# Altium PCB A1_v31.PcbDoc (part 2 of 6)
Units mil, origin at the board's own origin, x right, y up, seen from the top; angles counter-clockwise.
Board outline 3937.01 x 3149.61 mil, 2 copper layers (Top Layer, Bottom Layer); 94 components, 93 nets, 325 pads, 43 vias.
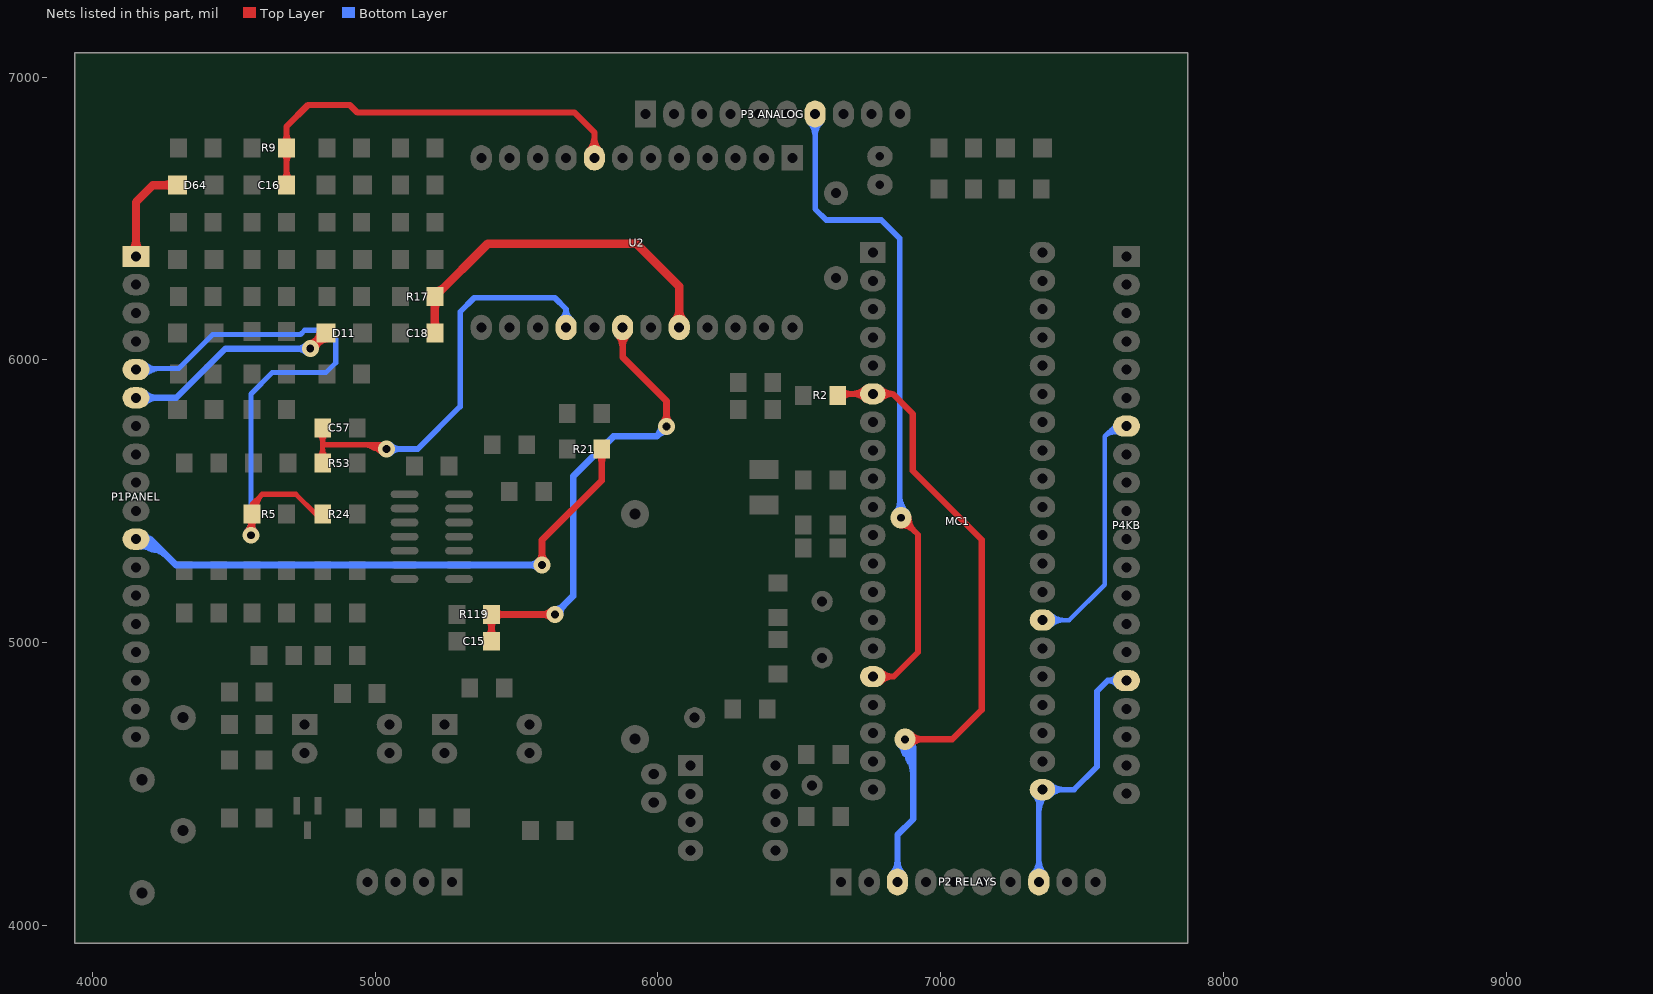
[diagram p2: the nets of this part, all layers, seen from the top]

## Via types
v1: diameter 60, hole 28, Top Layer to Bottom Layer, 30 vias
v2: diameter 90, hole 35.43, Top Layer to Bottom Layer, 6 vias
v3: diameter 75, hole 28, Top Layer to Bottom Layer, 5 vias
v4: diameter 75, hole 35.43, Top Layer to Bottom Layer, 2 vias

## Nets (pads, with @x,y where several pads share a name; then routed paths per layer and width w, separated by ;. In a path a pad name is that pad's centre, name@x,y a point inside that pad or via, vN(x,y) a via of type N, cw(c..) or ccw(c..) an arc to the next point about the centre after c; other vN are vias at no path point) (continued)
EMSTP: C18.2 R17.2 U2.20 | length 1969.8
  Top Layer w30: C18.2@5211.02,6095 R17.2@5211.02,6224.43 5397.6,6411 5924,6411 6075,6260 U2.20@6075,6115 ; C18.2@5200.75,6109.21 ccw(c5175.95,6134.01) 5211.02,6134.01 ; C18.2@5200.75,6109.21 ccw(c5175.95,6134.01) 5211.02,6134.01 ; C18.2@5200.75,6109.21 ccw(c5175.95,6134.01) 5211.02,6134.01 ; R17.2@5200.75,6210.22 cw(c5175.95,6185.42) 5211.02,6185.42 ; R17.2@5200.75,6210.22 cw(c5175.95,6185.42) 5211.02,6185.42 ; R17.2@5200.75,6210.22 cw(c5175.95,6185.42) 5211.02,6185.42 ; 5211.02,6134.01 ccw(c5246.1,6134.01) C18.2@5221.3,6109.21 ; 5211.02,6134.01 ccw(c5246.1,6134.01) C18.2@5221.3,6109.21 ; 5211.02,6134.01 ccw(c5246.1,6134.01) C18.2@5221.3,6109.21 ; 5211.02,6185.42 cw(c5246.1,6185.42) R17.2@5221.3,6210.22 ; 5211.02,6185.42 cw(c5246.1,6185.42) R17.2@5221.3,6210.22 ; 5211.02,6185.42 cw(c5246.1,6185.42) R17.2@5221.3,6210.22 ; R17.2@5211.02,6242.89 ccw(c5211.02,6287.47) 5242.54,6255.95 ; R17.2@5211.02,6242.89 ccw(c5211.02,6287.47) 5242.54,6255.95 ; R17.2@5211.02,6242.89 ccw(c5211.02,6287.47) 5242.54,6255.95 ; U2.20@6059.09,6138.41 ccw(c6020.68,6176.82) 6075,6176.82 ; U2.20@6059.09,6138.41 ccw(c6020.68,6176.82) 6075,6176.82 ; U2.20@6059.09,6138.41 ccw(c6020.68,6176.82) 6075,6176.82 ; 6075,6176.82 ccw(c6129.32,6176.82) U2.20@6090.91,6138.41 ; 6075,6176.82 ccw(c6129.32,6176.82) U2.20@6090.91,6138.41 ; 6075,6176.82 ccw(c6129.32,6176.82) U2.20@6090.91,6138.41
EMSTPIN: D11.2 P1PANEL.6 | length 4512.8
  Top Layer w22: v1(4770.04,6040) D11.2@4825.04,6095 ; v1@4771.65,6058.93 ccw(c4774.37,6091.01) 4797.14,6068.25 ccw(c4818.04,6047.35) v1@4788.82,6042.87 ; v1@4772.91,6058.78 ccw(c4777.39,6088) 4798.29,6067.1 ccw(c4821.05,6044.33) v1@4788.97,6041.61 ; v1@4783.47,6054.58 cw(c4815.81,6035.9) D11.2@4821.57,6072.8 ; v1@4784.62,6053.43 ccw(c4765.94,6085.77) D11.2@4802.84,6091.53 ; v1@4766.6,6058.69 ccw(c4757.13,6110.19) D11.2@4802.49,6084.01 ; v1@4766.6,6058.69 ccw(c4757.13,6110.19) D11.2@4802.49,6084.01 ; v1@4766.6,6058.69 ccw(c4757.13,6110.19) D11.2@4802.49,6084.01 ; v1@4766.6,6058.69 ccw(c4757.13,6110.19) D11.2@4802.49,6084.01 ; v1@4766.6,6058.69 ccw(c4757.13,6110.19) D11.2@4802.49,6084.01 ; v1@4766.6,6058.69 ccw(c4757.13,6110.19) D11.2@4802.49,6084.01 ; v1@4767.1,6040.6 cw(c4797.25,6034.43) 4789.29,6064.16 ; v1@4767.1,6040.6 cw(c4797.25,6034.43) 4789.29,6064.16 ; v1@4767.1,6040.6 cw(c4797.25,6034.43) 4789.29,6064.16 ; v1@4770.04,6059 ccw(c4770.04,6104.87) D11.2@4802.48,6072.44 ; v1@4770.04,6059 ccw(c4770.04,6104.87) D11.2@4802.48,6072.44 ; v1@4770.04,6059 ccw(c4770.04,6104.87) D11.2@4802.48,6072.44 ; v1@4770.64,6037.06 ccw(c4764.47,6067.21) 4794.2,6059.25 ; v1@4770.64,6037.06 ccw(c4764.47,6067.21) 4794.2,6059.25 ; v1@4770.64,6037.06 ccw(c4764.47,6067.21) 4794.2,6059.25 ; v1@4772.54,6058.83 ccw(c4777.25,6094.3) D11.2@4808.24,6076.41 ; v1@4772.54,6058.83 ccw(c4777.25,6094.3) D11.2@4808.24,6076.41 ; v1@4772.54,6058.83 ccw(c4777.25,6094.3) D11.2@4808.24,6076.41 ; v1@4772.54,6058.83 ccw(c4777.25,6094.3) D11.2@4808.24,6076.41 ; v1@4772.54,6058.83 ccw(c4777.25,6094.3) D11.2@4808.24,6076.41 ; v1@4774.96,6058.35 ccw(c4781.44,6082.56) 4793.97,6060.86 ; v1@4774.96,6058.35 ccw(c4781.44,6082.56) 4793.97,6060.86 ; v1@4774.96,6058.35 ccw(c4781.44,6082.56) 4793.97,6060.86 ; v1@4774.96,6058.35 ccw(c4781.44,6082.56) 4793.97,6060.86 ; v1@4774.96,6058.35 ccw(c4781.44,6082.56) 4793.97,6060.86 ; v1@4774.96,6058.35 ccw(c4781.44,6082.56) 4793.97,6060.86 ; v1@4775.45,6058.21 ccw(c4784.38,6088.32) D11.2@4806.59,6066.11 ; v1@4775.45,6058.21 ccw(c4784.38,6088.32) D11.2@4806.59,6066.11 ; v1@4775.45,6058.21 ccw(c4784.38,6088.32) D11.2@4806.59,6066.11 ; v1@4775.45,6058.21 ccw(c4784.38,6088.32) D11.2@4806.59,6066.11 ; v1@4777.78,6058.18 ccw(c4752.69,6101.65) D11.2@4802.67,6097.06 ; v1@4777.78,6058.18 ccw(c4752.69,6101.65) D11.2@4802.67,6097.06 ; v1@4777.78,6058.18 ccw(c4752.69,6101.65) D11.2@4802.67,6097.06 ; v1@4783.32,6064.84 cw(c4808.08,6040.08) D11.2@4818.41,6073.54 ; v1@4783.32,6064.84 cw(c4808.08,6040.08) D11.2@4818.41,6073.54 ; v1@4783.32,6064.84 cw(c4808.08,6040.08) D11.2@4818.41,6073.54 ; v1@4783.32,6064.84 cw(c4808.08,6040.08) D11.2@4818.41,6073.54 ; v1@4786.69,6056.65 cw(c4825.04,6018.3) D11.2@4825.04,6072.54 ; v1@4786.69,6056.65 ccw(c4748.34,6095) D11.2@4802.58,6095 ; v1@4786.69,6056.65 ccw(c4748.34,6095) D11.2@4802.58,6095 ; v1@4786.69,6056.65 cw(c4825.04,6018.3) D11.2@4825.04,6072.54 ; v1@4786.69,6056.65 ccw(c4748.34,6095) D11.2@4802.58,6095 ; v1@4786.69,6056.65 cw(c4825.04,6018.3) D11.2@4825.04,6072.54 ; v1@4788.22,6047.74 cw(c4831.69,6022.65) D11.2@4827.1,6072.63 ; v1@4788.22,6047.74 cw(c4831.69,6022.65) D11.2@4827.1,6072.63 ; v1@4788.22,6047.74 cw(c4831.69,6022.65) D11.2@4827.1,6072.63 ; v1@4788.25,6045.41 cw(c4818.36,6054.34) D11.2@4796.15,6076.55 ; v1@4788.25,6045.41 cw(c4818.36,6054.34) D11.2@4796.15,6076.55 ; v1@4788.25,6045.41 cw(c4818.36,6054.34) D11.2@4796.15,6076.55 ; v1@4788.25,6045.41 cw(c4818.36,6054.34) D11.2@4796.15,6076.55 ; v1@4788.39,6044.92 cw(c4812.6,6051.4) 4790.9,6063.93 ; v1@4788.39,6044.92 cw(c4812.6,6051.4) 4790.9,6063.93 ; v1@4788.39,6044.92 cw(c4812.6,6051.4) 4790.9,6063.93 ; v1@4788.39,6044.92 cw(c4812.6,6051.4) 4790.9,6063.93 ; v1@4788.39,6044.92 cw(c4812.6,6051.4) 4790.9,6063.93 ; v1@4788.39,6044.92 cw(c4812.6,6051.4) 4790.9,6063.93 ; v1@4788.73,6036.56 cw(c4840.23,6027.09) D11.2@4814.05,6072.45 ; v1@4788.73,6036.56 cw(c4840.23,6027.09) D11.2@4814.05,6072.45 ; v1@4788.73,6036.56 cw(c4840.23,6027.09) D11.2@4814.05,6072.45 ; v1@4788.73,6036.56 cw(c4840.23,6027.09) D11.2@4814.05,6072.45 ; v1@4788.73,6036.56 cw(c4840.23,6027.09) D11.2@4814.05,6072.45 ; v1@4788.73,6036.56 cw(c4840.23,6027.09) D11.2@4814.05,6072.45 ; v1@4788.87,6042.5 cw(c4824.34,6047.21) D11.2@4806.45,6078.2 ; v1@4788.87,6042.5 cw(c4824.34,6047.21) D11.2@4806.45,6078.2 ; v1@4788.87,6042.5 cw(c4824.34,6047.21) D11.2@4806.45,6078.2 ; v1@4788.87,6042.5 cw(c4824.34,6047.21) D11.2@4806.45,6078.2 ; v1@4788.87,6042.5 cw(c4824.34,6047.21) D11.2@4806.45,6078.2 ; v1@4789.04,6040 cw(c4834.91,6040) D11.2@4802.48,6072.44 ; v1@4789.04,6040 cw(c4834.91,6040) D11.2@4802.48,6072.44 ; v1@4789.04,6040 cw(c4834.91,6040) D11.2@4802.48,6072.44 ; D11.2@4794.87,6076.39 ccw(c4776.26,6095) D11.2@4802.58,6095 ; D11.2@4794.87,6076.39 ccw(c4776.26,6095) D11.2@4802.58,6095 ; D11.2@4794.87,6076.39 ccw(c4776.26,6095) D11.2@4802.58,6095 ; D11.2@4794.87,6076.39 ccw(c4776.26,6095) D11.2@4802.58,6095 ; v1@4794.88,6053.28 ccw(c4770.12,6078.04) D11.2@4803.58,6088.37 ; v1@4794.88,6053.28 ccw(c4770.12,6078.04) D11.2@4803.58,6088.37 ; v1@4794.88,6053.28 ccw(c4770.12,6078.04) D11.2@4803.58,6088.37 ; v1@4794.88,6053.28 ccw(c4770.12,6078.04) D11.2@4803.58,6088.37 ; D11.2@4799.47,6070.7 cw(c4812.49,6048.15) D11.2@4819.23,6073.3 ; D11.2@4799.47,6070.7 cw(c4812.49,6048.15) D11.2@4819.23,6073.3 ; D11.2@4799.47,6070.7 cw(c4812.49,6048.15) D11.2@4819.23,6073.3 ; D11.2@4800.74,6069.43 ccw(c4778.19,6082.45) D11.2@4803.34,6089.19 ; D11.2@4800.74,6069.43 ccw(c4778.19,6082.45) D11.2@4803.34,6089.19 ; D11.2@4800.74,6069.43 ccw(c4778.19,6082.45) D11.2@4803.34,6089.19 ; D11.2@4806.43,6064.83 cw(c4825.04,6046.22) D11.2@4825.04,6072.54 ; D11.2@4806.43,6064.83 cw(c4825.04,6046.22) D11.2@4825.04,6072.54 ; D11.2@4806.43,6064.83 cw(c4825.04,6046.22) D11.2@4825.04,6072.54 ; D11.2@4806.43,6064.83 cw(c4825.04,6046.22) D11.2@4825.04,6072.54
  Bottom Layer w22: P1PANEL.6@4153.54,5866.14 4296.14,5866.14 4470,6040 v1(4770.04,6040) ; P1PANEL.6@4182.28,5847.4 cw(c4227.52,5802.17) 4227.52,5866.14 ; P1PANEL.6@4182.28,5847.4 cw(c4227.52,5802.17) 4227.52,5866.14 ; P1PANEL.6@4182.28,5847.4 cw(c4227.52,5802.17) 4227.52,5866.14 ; P1PANEL.6@4182.28,5884.88 ccw(c4227.52,5930.12) 4227.52,5866.14 ; P1PANEL.6@4182.28,5884.88 ccw(c4227.52,5930.12) 4227.52,5866.14 ; P1PANEL.6@4182.28,5884.88 ccw(c4227.52,5930.12) 4227.52,5866.14 ; 4724.17,6040 cw(c4724.17,5994.13) v1@4756.6,6026.56 ; 4724.17,6040 ccw(c4724.17,6085.87) v1@4756.6,6053.44 ; 4724.17,6040 ccw(c4724.17,6085.87) v1@4756.6,6053.44 ; 4724.17,6040 cw(c4724.17,5994.13) v1@4756.6,6026.56 ; 4724.17,6040 ccw(c4724.17,6085.87) v1@4756.6,6053.44 ; 4724.17,6040 cw(c4724.17,5994.13) v1@4756.6,6026.56
FAULTIND: MC1.27 P4KB.7 | length 1442.3
  Bottom Layer w16: MC1.27@7360,5080 7455,5080 7580,5205 7580,5729.61 ; P4KB.7@7657.48,5766.14 7616.53,5766.14 7580,5729.61 ; MC1.27@7388.36,5059.14 cw(c7438.72,5008.78) 7438.72,5080 ; MC1.27@7388.36,5059.14 cw(c7438.72,5008.78) 7438.72,5080 ; MC1.27@7388.36,5059.14 cw(c7438.72,5008.78) 7438.72,5080 ; MC1.27@7388.36,5100.86 ccw(c7438.72,5151.22) 7438.72,5080 ; MC1.27@7388.36,5100.86 ccw(c7438.72,5151.22) 7438.72,5080 ; MC1.27@7388.36,5100.86 ccw(c7438.72,5151.22) 7438.72,5080 ; 7580,5729.61 cw(c7614.53,5695.08) 7635.07,5739.38 ccw(c7614.53,5695.08) 7580,5729.61 ; 7596.2,5745.8 cw(c7624.79,5717.21) 7641.8,5753.89 ccw(c7624.79,5717.21) 7596.2,5745.8
FLDIR: C57.1 R53.1 U2.16 | length 2880.7
  Top Layer w18: R53.1@4813.98,5635 4813.98,5700 C57.1@4813.98,5740 ; R53.1@4799.46,5653.45 ccw(c4764.42,5688.49) 4813.98,5688.49 ; R53.1@4799.46,5653.45 ccw(c4764.42,5688.49) 4813.98,5688.49 ; R53.1@4799.46,5653.45 ccw(c4764.42,5688.49) 4813.98,5688.49 ; C57.1@4799.46,5741.55 cw(c4764.42,5706.51) 4813.98,5706.51 ; C57.1@4799.46,5741.55 cw(c4764.42,5706.51) 4813.98,5706.51 ; C57.1@4799.46,5741.55 cw(c4764.42,5706.51) 4813.98,5706.51 ; 4813.98,5688.49 ccw(c4863.53,5688.49) R53.1@4828.49,5653.45 ; 4813.98,5688.49 ccw(c4863.53,5688.49) R53.1@4828.49,5653.45 ; 4813.98,5688.49 ccw(c4863.53,5688.49) R53.1@4828.49,5653.45 ; 4813.98,5706.51 cw(c4863.53,5706.51) C57.1@4828.49,5741.55 ; 4813.98,5706.51 cw(c4863.53,5706.51) C57.1@4828.49,5741.55 ; 4813.98,5706.51 cw(c4863.53,5706.51) C57.1@4828.49,5741.55
  Top Layer w20: 4813.98,5700 5025,5700 v1(5040,5685) ; 4955.5,5700 cw(c4955.5,5600.5) v1@5025.86,5670.86 ; 4955.5,5700 cw(c4955.5,5600.5) v1@5025.86,5670.86 ; 4955.5,5700 cw(c4955.5,5600.5) v1@5025.86,5670.86 ; 4990.91,5691.03 ccw(c5003.92,5713.56) v1@5024.32,5697.41 ; 4990.91,5691.03 ccw(c5003.92,5713.56) v1@5024.32,5697.41 ; 4990.91,5691.03 ccw(c5003.92,5713.56) v1@5024.32,5697.41 ; 5003.79,5700 cw(c5003.79,5648.79) v1(5040,5685) ; 5003.79,5700 cw(c5003.79,5648.79) v1(5040,5685) ; 5003.79,5700 cw(c5003.79,5648.79) v1(5040,5685)
  Bottom Layer w20: v1(5040,5685) 5150,5685 5300,5835 5300,6170 5350,6220 5635,6220 5675,6180 ; U2.16@5675,6115 5675,6180 ; v1@5054.14,5670.86 cw(c5088.28,5636.72) 5088.28,5685 ; v1@5054.14,5670.86 cw(c5088.28,5636.72) 5088.28,5685 ; v1@5054.14,5670.86 cw(c5088.28,5636.72) 5088.28,5685 ; v1@5054.14,5699.14 ccw(c5088.28,5733.28) 5088.28,5685 ; v1@5054.14,5699.14 ccw(c5088.28,5733.28) 5088.28,5685 ; v1@5054.14,5699.14 ccw(c5088.28,5733.28) 5088.28,5685 ; U2.16@5657.74,6143.91 ccw(c5628.64,6180) 5675,6180 ; U2.16@5657.74,6143.91 ccw(c5628.64,6180) 5675,6180 ; U2.16@5657.74,6143.91 ccw(c5628.64,6180) 5675,6180 ; 5675,6180 ccw(c5721.36,6180) U2.16@5692.26,6143.91 ; 5675,6180 ccw(c5721.36,6180) U2.16@5692.26,6143.91 ; 5675,6180 ccw(c5721.36,6180) U2.16@5692.26,6143.91
FLDIRIN: P1PANEL.5 R5.2 R24.1 | length 2648.5
  Top Layer w18: v1@4545.15,5394.85 ccw(c4509.3,5430.7) 4560,5430.7 ccw(c4610.7,5430.7) v1@4574.85,5394.85 ; R5.2@4549.46,5436.55 cw(c4524.02,5411.1) 4560,5411.1 ; v1@4550.97,5398.96 ccw(c4538.04,5426.09) 4567.08,5418.32 ccw(c4588.68,5412.53) v1@4573.89,5395.75 ; R5.2@4556.52,5478.06 ccw(c4552.26,5488.98) 4563.98,5488.98 ; v1(4560,5380) 4560,5451.02 R5.2@4563.98,5455 4563.98,5488.98 ; v1@4560,5391.91 cw(c4623.13,5391.91) R5.2@4578.49,5436.55 ; R5.2@4566.42,5459.6 cw(c4609.72,5471.29) 4578,5503 ; R5.2@4571.43,5478.06 cw(c4575.69,5488.98) 4563.98,5488.98 ; R5.2@4583.79,5464.29 cw(c4644.35,5480.64) 4600,5525 ; R24.1@4813.98,5455 4789,5455 4719,5525 4600,5525 ; 4563.98,5488.98 4600,5525
  Bottom Layer w18: P1PANEL.5@4153.54,5966.14 4157.4,5970 4305,5970 4425,6090 4735.14,6090 4750.14,6105 4830,6105 4860,6075 4860,5990 4825,5955 4635,5955 4560,5880 v1(4560,5380) ; P1PANEL.5@4183.7,5945.99 cw(c4241.66,5888.02) 4241.66,5970 ; P1PANEL.5@4183.7,5986.29 ccw(c4223.04,6025.63) 4223.04,5970 ; v1@4545.15,5394.85 ccw(c4509.3,5430.7) 4560,5430.7 ccw(c4610.7,5430.7) v1@4574.85,5394.85
FLG: C15.1 R119.2 U2.18 | length 3358.7
  Top Layer w24: C15.1@5411.02,5005 R119.2@5411.02,5100 v1(5635,5100) ; U2.18@5875,6115 5875,6010 6030,5855 v1(6030,5765) ; C15.1@5398.63,5021.33 ccw(c5368.71,5051.25) 5411.02,5051.25 ; C15.1@5398.63,5021.33 ccw(c5368.71,5051.25) 5411.02,5051.25 ; C15.1@5398.63,5021.33 ccw(c5368.71,5051.25) 5411.02,5051.25 ; R119.2@5398.63,5083.67 cw(c5368.71,5053.75) 5411.02,5053.75 ; R119.2@5398.63,5083.67 cw(c5368.71,5053.75) 5411.02,5053.75 ; R119.2@5398.63,5083.67 cw(c5368.71,5053.75) 5411.02,5053.75 ; 5411.02,5051.25 ccw(c5453.34,5051.25) C15.1@5423.42,5021.33 ; 5411.02,5051.25 ccw(c5453.34,5051.25) C15.1@5423.42,5021.33 ; 5411.02,5051.25 ccw(c5453.34,5051.25) C15.1@5423.42,5021.33 ; 5411.02,5053.75 cw(c5453.34,5053.75) R119.2@5423.42,5083.67 ; 5411.02,5053.75 cw(c5453.34,5053.75) R119.2@5423.42,5083.67 ; 5411.02,5053.75 cw(c5453.34,5053.75) R119.2@5423.42,5083.67 ; R119.2@5423.42,5087.61 cw(c5453.34,5057.68) 5453.34,5100 ; R119.2@5423.42,5087.61 cw(c5453.34,5057.68) 5453.34,5100 ; R119.2@5423.42,5087.61 cw(c5453.34,5057.68) 5453.34,5100 ; R119.2@5423.42,5112.39 ccw(c5453.34,5142.32) 5453.34,5100 ; R119.2@5423.42,5112.39 ccw(c5453.34,5142.32) 5453.34,5100 ; R119.2@5423.42,5112.39 ccw(c5453.34,5142.32) 5453.34,5100 ; 5591.54,5100 cw(c5591.54,5056.54) v1@5622.27,5087.27 ; 5591.54,5100 ccw(c5591.54,5143.46) v1@5622.27,5112.73 ; 5591.54,5100 ccw(c5591.54,5143.46) v1@5622.27,5112.73 ; 5591.54,5100 cw(c5591.54,5056.54) v1@5622.27,5087.27 ; 5591.54,5100 ccw(c5591.54,5143.46) v1@5622.27,5112.73 ; 5591.54,5100 cw(c5591.54,5056.54) v1@5622.27,5087.27 ; U2.18@5856.97,6089.47 cw(c5813.44,6045.94) 5875,6045.94 ; U2.18@5856.97,6089.47 cw(c5813.44,6045.94) 5875,6045.94 ; U2.18@5856.97,6089.47 cw(c5813.44,6045.94) 5875,6045.94 ; 5875,6045.94 cw(c5936.56,6045.94) U2.18@5893.03,6089.47 ; 5875,6045.94 cw(c5936.56,6045.94) U2.18@5893.03,6089.47 ; 5875,6045.94 cw(c5936.56,6045.94) U2.18@5893.03,6089.47 ; v1@6017.27,5777.73 ccw(c5986.54,5808.46) 6030,5808.46 ; v1@6017.27,5777.73 ccw(c5986.54,5808.46) 6030,5808.46 ; v1@6017.27,5777.73 ccw(c5986.54,5808.46) 6030,5808.46 ; 6030,5808.46 ccw(c6073.46,5808.46) v1@6042.73,5777.73 ; 6030,5808.46 ccw(c6073.46,5808.46) v1@6042.73,5777.73 ; 6030,5808.46 ccw(c6073.46,5808.46) v1@6042.73,5777.73
  Bottom Layer w24: v1(5635,5100) 5700,5165 5700,5587.67 5842.33,5730 5995,5730 v1(6030,5765) ; v1@5635,5118 ccw(c5635,5161.46) 5665.73,5130.73 ; v1@5635,5118 ccw(c5635,5161.46) 5665.73,5130.73 ; v1@5635,5118 ccw(c5635,5161.46) 5665.73,5130.73 ; v1@5653,5100 cw(c5696.46,5100) 5665.73,5130.73 ; v1@5653,5100 cw(c5696.46,5100) 5665.73,5130.73 ; v1@5653,5100 cw(c5696.46,5100) 5665.73,5130.73 ; 5999.27,5734.27 cw(c6030,5703.54) v1@6030,5747 ; 5999.27,5734.27 ccw(c5968.54,5765) v1@6012,5765 ; 5999.27,5734.27 ccw(c5968.54,5765) v1@6012,5765 ; 5999.27,5734.27 cw(c6030,5703.54) v1@6030,5747 ; 5999.27,5734.27 ccw(c5968.54,5765) v1@6012,5765 ; 5999.27,5734.27 cw(c6030,5703.54) v1@6030,5747
FLGIN: P1PANEL.11 R21.2 | length 3675.7
  Top Layer w24: v1(5590,5275) 5590,5362.95 5801.02,5573.98 R21.2@5801.02,5685 ; v1@5577.27,5287.73 ccw(c5546.54,5318.46) 5590,5318.46 ; v1@5577.27,5287.73 ccw(c5546.54,5318.46) 5590,5318.46 ; v1@5577.27,5287.73 ccw(c5546.54,5318.46) 5590,5318.46 ; 5590,5318.46 ccw(c5633.46,5318.46) v1@5602.73,5287.73 ; 5590,5318.46 ccw(c5633.46,5318.46) v1@5602.73,5287.73 ; 5590,5318.46 ccw(c5633.46,5318.46) v1@5602.73,5287.73 ; R21.2@5788.63,5668.67 cw(c5758.71,5638.75) 5801.02,5638.75 ; R21.2@5788.63,5668.67 cw(c5758.71,5638.75) 5801.02,5638.75 ; R21.2@5788.63,5668.67 cw(c5758.71,5638.75) 5801.02,5638.75 ; 5801.02,5638.75 cw(c5843.34,5638.75) R21.2@5813.42,5668.67 ; 5801.02,5638.75 cw(c5843.34,5638.75) R21.2@5813.42,5668.67 ; 5801.02,5638.75 cw(c5843.34,5638.75) R21.2@5813.42,5668.67
  Bottom Layer w24: P1PANEL.11@4153.54,5366.14 4203.86,5366.14 ; P1PANEL.11@4163.76,5364.66 cw(c4174.2,5292.02) 4226.09,5343.91 ; P1PANEL.11@4167.17,5340.9 cw(c4182.72,5232.73) 4260,5310 ; v1(5590,5275) 4295,5275 4203.86,5366.14 ; P1PANEL.11@4164.81,5366.95 ccw(c4238.59,5414.4) 4219.96,5328.68 ; P1PANEL.11@4164.81,5366.95 ccw(c4238.59,5414.4) 4219.96,5328.68 ; P1PANEL.11@4164.81,5366.95 ccw(c4238.59,5414.4) 4219.96,5328.68 ; P1PANEL.11@4179.57,5346.31 cw(c4204.03,5316.02) 4212.3,5354.07 ; P1PANEL.11@4179.57,5346.31 cw(c4204.03,5316.02) 4212.3,5354.07 ; P1PANEL.11@4179.57,5346.31 cw(c4204.03,5316.02) 4212.3,5354.07 ; P1PANEL.11@4186.59,5355.22 cw(c4203.86,5347.03) 4203.86,5366.14 ; P1PANEL.11@4186.59,5355.22 cw(c4203.86,5347.03) 4203.86,5366.14 ; P1PANEL.11@4186.59,5355.22 cw(c4203.86,5347.03) 4203.86,5366.14 ; P1PANEL.11@4186.59,5377.07 ccw(c4203.86,5385.26) 4203.86,5366.14 ; P1PANEL.11@4186.59,5377.07 ccw(c4203.86,5385.26) 4203.86,5366.14 ; P1PANEL.11@4186.59,5377.07 ccw(c4203.86,5385.26) 4203.86,5366.14 ; P1PANEL.11@4187.3,5375.4 ccw(c4219.68,5388.02) 4212.3,5354.07 ; P1PANEL.11@4187.3,5375.4 ccw(c4219.68,5388.02) 4212.3,5354.07 ; P1PANEL.11@4187.3,5375.4 ccw(c4219.68,5388.02) 4212.3,5354.07 ; 5546.54,5275 cw(c5546.54,5231.54) v1@5577.27,5262.27 ; 5546.54,5275 ccw(c5546.54,5318.46) v1@5577.27,5287.73 ; 5546.54,5275 ccw(c5546.54,5318.46) v1@5577.27,5287.73 ; 5546.54,5275 cw(c5546.54,5231.54) v1@5577.27,5262.27 ; 5546.54,5275 ccw(c5546.54,5318.46) v1@5577.27,5287.73 ; 5546.54,5275 cw(c5546.54,5231.54) v1@5577.27,5262.27 ; P1PANEL.11@4163.62,5364.64 cw(c4167.93,5274.63) 4231.65,5338.35 ccw(c4167.93,5274.63) P1PANEL.11@4163.62,5364.64 ; P1PANEL.11@4164.76,5340.67 cw(c4171.43,5201.44) 4270,5300 ccw(c4171.43,5201.44) P1PANEL.11@4164.76,5340.67
FLSTART: "P2 RELAYS.3" MC1.6 R2.1 | length 5068.9
  Top Layer w22: R2.1@6636.02,5875 6641.02,5880 MC1.6@6760,5880 6830,5880 ; v3(6874,4658) 7041,4658 7145,4762 7145,5364 6901,5608 6901,5809 6830,5880 ; R2.1@6649.12,5865.84 cw(c6683.32,5831.64) 6683.32,5880 ; R2.1@6649.12,5865.84 cw(c6683.32,5831.64) 6683.32,5880 ; R2.1@6649.12,5865.84 cw(c6683.32,5831.64) 6683.32,5880 ; R2.1@6649.12,5892.04 ccw(c6678.19,5921.1) 6678.19,5880 ; R2.1@6649.12,5892.04 ccw(c6678.19,5921.1) 6678.19,5880 ; R2.1@6649.12,5892.04 ccw(c6678.19,5921.1) 6678.19,5880 ; 6688.52,5880 cw(c6688.52,5816.02) MC1.6@6733.76,5861.26 ; 6688.52,5880 ccw(c6688.52,5943.98) MC1.6@6733.76,5898.74 ; 6688.52,5880 ccw(c6688.52,5943.98) MC1.6@6733.76,5898.74 ; 6688.52,5880 cw(c6688.52,5816.02) MC1.6@6733.76,5861.26 ; 6688.52,5880 ccw(c6688.52,5943.98) MC1.6@6733.76,5898.74 ; 6688.52,5880 cw(c6688.52,5816.02) MC1.6@6733.76,5861.26 ; MC1.6@6786.55,5861.58 cw(c6830,5819.55) 6830,5880 ; MC1.6@6786.55,5861.58 cw(c6830,5819.55) 6830,5880 ; MC1.6@6786.55,5861.58 cw(c6830,5819.55) 6830,5880 ; MC1.6@6786.55,5898.42 ccw(c6830,5940.45) 6830,5880 ; MC1.6@6786.55,5898.42 ccw(c6830,5940.45) 6830,5880 ; MC1.6@6786.55,5898.42 ccw(c6830,5940.45) 6830,5880 ; v3@6892.74,4639.26 cw(c6937.98,4594.02) 6937.98,4658 ; v3@6892.74,4639.26 cw(c6937.98,4594.02) 6937.98,4658 ; v3@6892.74,4639.26 cw(c6937.98,4594.02) 6937.98,4658 ; v3@6892.74,4676.74 ccw(c6937.98,4721.98) 6937.98,4658 ; v3@6892.74,4676.74 ccw(c6937.98,4721.98) 6937.98,4658 ; v3@6892.74,4676.74 ccw(c6937.98,4721.98) 6937.98,4658
  Bottom Layer w22: 6847.24,4153.54 6847.24,4320.24 6903,4376 6903,4629 v3(6874,4658) ; 6828.51,4182.28 ccw(c6783.27,4227.52) 6847.24,4227.52 ; 6828.51,4182.28 ccw(c6783.27,4227.52) 6847.24,4227.52 ; 6828.51,4182.28 ccw(c6783.27,4227.52) 6847.24,4227.52 ; 6847.24,4227.52 ccw(c6911.22,4227.52) 6865.98,4182.28 ; 6847.24,4227.52 ccw(c6911.22,4227.52) 6865.98,4182.28 ; 6847.24,4227.52 ccw(c6911.22,4227.52) 6865.98,4182.28 ; v3@6855.26,4639.26 cw(c6740.01,4524.01) 6903,4524.01 ; v3@6855.26,4639.26 cw(c6740.01,4524.01) 6903,4524.01 ; v3@6855.26,4639.26 cw(c6740.01,4524.01) 6903,4524.01 ; v3@6867.14,4632.4 cw(c6854.42,4584.94) 6896.98,4609.51 ; v3@6867.14,4632.4 cw(c6854.42,4584.94) 6896.98,4609.51 ; v3@6867.14,4632.4 cw(c6854.42,4584.94) 6896.98,4609.51 ; v3@6870.82,4654.82 cw(c6793.12,4577.12) 6903,4577.12 ; v3@6870.82,4654.82 cw(c6793.12,4577.12) 6903,4577.12 ; v3@6870.82,4654.82 cw(c6793.12,4577.12) 6903,4577.12 ; 6873.91,4606.95 cw(c6911.11,4628.43) v3@6877.52,4655.2 ; 6873.91,4606.95 cw(c6911.11,4628.43) v3@6877.52,4655.2 ; 6873.91,4606.95 cw(c6911.11,4628.43) v3@6877.52,4655.2 ; v3@6886.37,4670.37 cw(c6846.24,4630.24) 6903,4630.24 ; v3@6886.37,4670.37 cw(c6846.24,4630.24) 6903,4630.24 ; v3@6886.37,4670.37 cw(c6846.24,4630.24) 6903,4630.24 ; 6890.06,4579 cw(c6938.24,4606.82) v3@6894.73,4641.49 ; 6890.06,4579 cw(c6938.24,4606.82) v3@6894.73,4641.49 ; 6890.06,4579 cw(c6938.24,4606.82) v3@6894.73,4641.49 ; v3@6897.38,4645.52 ccw(c6931.69,4627.19) 6898,4607.74 ; v3@6897.38,4645.52 ccw(c6931.69,4627.19) 6898,4607.74 ; v3@6897.38,4645.52 ccw(c6931.69,4627.19) 6898,4607.74
FLT1: C16.2 R9.2 U2.8 | length 2391.9
  Top Layer w22: C16.2@4686.02,6618.61 R9.2@4686.02,6750 4686.02,6826.02 4762,6902 4910,6902 4937,6875 5705,6875 5775,6805 U2.8@5775,6715 ; C16.2@4672.92,6635.64 ccw(c4641.29,6667.27) 4686.02,6667.27 ; C16.2@4672.92,6635.64 ccw(c4641.29,6667.27) 4686.02,6667.27 ; C16.2@4672.92,6635.64 ccw(c4641.29,6667.27) 4686.02,6667.27 ; R9.2@4672.92,6732.96 cw(c4641.29,6701.33) 4686.02,6701.33 ; R9.2@4672.92,6732.96 cw(c4641.29,6701.33) 4686.02,6701.33 ; R9.2@4672.92,6732.96 cw(c4641.29,6701.33) 4686.02,6701.33 ; R9.2@4672.92,6767.04 ccw(c4641.29,6798.67) 4686.02,6798.67 ; R9.2@4672.92,6767.04 ccw(c4641.29,6798.67) 4686.02,6798.67 ; R9.2@4672.92,6767.04 ccw(c4641.29,6798.67) 4686.02,6798.67 ; 4686.02,6667.27 ccw(c4730.75,6667.27) C16.2@4699.12,6635.64 ; 4686.02,6667.27 ccw(c4730.75,6667.27) C16.2@4699.12,6635.64 ; 4686.02,6667.27 ccw(c4730.75,6667.27) C16.2@4699.12,6635.64 ; 4686.02,6701.33 cw(c4730.75,6701.33) R9.2@4699.12,6732.96 ; 4686.02,6701.33 cw(c4730.75,6701.33) R9.2@4699.12,6732.96 ; 4686.02,6701.33 cw(c4730.75,6701.33) R9.2@4699.12,6732.96 ; 4686.02,6798.67 ccw(c4730.75,6798.67) R9.2@4699.12,6767.04 ; 4686.02,6798.67 ccw(c4730.75,6798.67) R9.2@4699.12,6767.04 ; 4686.02,6798.67 ccw(c4730.75,6798.67) R9.2@4699.12,6767.04 ; U2.8@5756.26,6741.24 ccw(c5711.02,6786.48) 5775,6786.48 ; U2.8@5756.26,6741.24 ccw(c5711.02,6786.48) 5775,6786.48 ; U2.8@5756.26,6741.24 ccw(c5711.02,6786.48) 5775,6786.48 ; 5775,6786.48 ccw(c5838.98,6786.48) U2.8@5793.74,6741.24 ; 5775,6786.48 ccw(c5838.98,6786.48) U2.8@5793.74,6741.24 ; 5775,6786.48 ccw(c5838.98,6786.48) U2.8@5793.74,6741.24
FLT1IN: D64.2 P1PANEL.1 | length 829.8
  Top Layer w30: P1PANEL.1@4153.54,6366.14 4153.54,6558.54 4213.61,6618.61 D64.2@4300.04,6618.61 ; P1PANEL.1@4137.63,6382.05 ccw(c4099.22,6420.46) 4153.54,6420.46 ; P1PANEL.1@4137.63,6382.05 ccw(c4099.22,6420.46) 4153.54,6420.46 ; P1PANEL.1@4137.63,6382.05 ccw(c4099.22,6420.46) 4153.54,6420.46 ; 4153.54,6420.46 ccw(c4207.86,6420.46) P1PANEL.1@4169.45,6382.05 ; 4153.54,6420.46 ccw(c4207.86,6420.46) P1PANEL.1@4169.45,6382.05 ; 4153.54,6420.46 ccw(c4207.86,6420.46) P1PANEL.1@4169.45,6382.05 ; 4255.46,6618.61 cw(c4255.46,6574.03) D64.2@4286.98,6605.55 ; 4255.46,6618.61 ccw(c4255.46,6663.18) D64.2@4286.98,6631.66 ; 4255.46,6618.61 ccw(c4255.46,6663.18) D64.2@4286.98,6631.66 ; 4255.46,6618.61 cw(c4255.46,6574.03) D64.2@4286.98,6605.55 ; 4255.46,6618.61 ccw(c4255.46,6663.18) D64.2@4286.98,6631.66 ; 4255.46,6618.61 cw(c4255.46,6574.03) D64.2@4286.98,6605.55
FREQ: "P3 ANALOG.7" MC1.16 | length 3619.1
  Top Layer w20: MC1.16@6760,4880 6834,4880 6920,4966 6920,5382 v3(6860,5442) ; MC1.16@6786.95,4860.55 cw(c6833.89,4813.61) 6833.89,4880 ; MC1.16@6786.95,4860.55 cw(c6833.89,4813.61) 6833.89,4880 ; MC1.16@6786.95,4860.55 cw(c6833.89,4813.61) 6833.89,4880 ; MC1.16@6786.95,4899.45 ccw(c6833.89,4946.39) 6833.89,4880 ; MC1.16@6786.95,4899.45 ccw(c6833.89,4946.39) 6833.89,4880 ; MC1.16@6786.95,4899.45 ccw(c6833.89,4946.39) 6833.89,4880 ; v3@6860,5414.5 cw(c6860,5348.11) 6906.95,5395.05 ; v3@6860,5414.5 cw(c6860,5348.11) 6906.95,5395.05 ; v3@6860,5414.5 cw(c6860,5348.11) 6906.95,5395.05 ; v3@6887.5,5442 ccw(c6953.89,5442) 6906.95,5395.05 ; v3@6887.5,5442 ccw(c6953.89,5442) 6906.95,5395.05 ; v3@6887.5,5442 ccw(c6953.89,5442) 6906.95,5395.05
  Bottom Layer w20: 6555.91,6870.08 6555.91,6534.09 6595,6495 6790,6495 6855,6430 6855,5442 v3(6860,5442) ; 6536.46,6840.63 cw(c6489.52,6793.69) 6555.91,6793.69 ; 6536.46,6840.63 cw(c6489.52,6793.69) 6555.91,6793.69 ; 6536.46,6840.63 cw(c6489.52,6793.69) 6555.91,6793.69 ; 6555.91,6793.69 cw(c6622.3,6793.69) 6575.35,6840.63 ; 6555.91,6793.69 cw(c6622.3,6793.69) 6575.35,6840.63 ; 6555.91,6793.69 cw(c6622.3,6793.69) 6575.35,6840.63 ; v3@6840.55,5461.45 ccw(c6805.68,5496.32) 6855,5496.32 ; v3@6840.55,5461.45 ccw(c6805.68,5496.32) 6855,5496.32 ; v3@6840.55,5461.45 ccw(c6805.68,5496.32) 6855,5496.32 ; 6855,5520.46 ccw(c6938.46,5520.46) v3@6879.45,5461.45 ; 6855,5520.46 ccw(c6938.46,5520.46) v3@6879.45,5461.45 ; 6855,5520.46 ccw(c6938.46,5520.46) v3@6879.45,5461.45
GCONTACT: "P2 RELAYS.8" MC1.21 P4KB.16 | length 2043.9
  Bottom Layer w20: 7347.24,4153.54 7347.24,4467.24 MC1.21@7360,4480 7472.13,4480 7553,4560.87 7553,4828 7591.14,4866.14 ; P4KB.16@7657.48,4866.14 7591.14,4866.14 ; 7327.8,4182.99 ccw(c7280.85,4229.93) 7347.24,4229.93 ; 7327.8,4182.99 ccw(c7280.85,4229.93) 7347.24,4229.93 ; 7327.8,4182.99 ccw(c7280.85,4229.93) 7347.24,4229.93 ; MC1.21@7333.05,4460.55 cw(c7298.8,4426.3) 7347.24,4426.3 ; MC1.21@7333.05,4460.55 cw(c7298.8,4426.3) 7347.24,4426.3 ; MC1.21@7333.05,4460.55 cw(c7298.8,4426.3) 7347.24,4426.3 ; 7347.24,4229.93 ccw(c7413.63,4229.93) 7366.69,4182.99 ; 7347.24,4229.93 ccw(c7413.63,4229.93) 7366.69,4182.99 ; 7347.24,4229.93 ccw(c7413.63,4229.93) 7366.69,4182.99 ; 7347.24,4400.92 cw(c7431.58,4400.92) MC1.21@7371.95,4460.55 ; 7347.24,4400.92 cw(c7431.58,4400.92) MC1.21@7371.95,4460.55 ; 7347.24,4400.92 cw(c7431.58,4400.92) MC1.21@7371.95,4460.55 ; MC1.21@7386.95,4460.55 cw(c7433.89,4413.61) 7433.89,4480 ; MC1.21@7386.95,4460.55 cw(c7433.89,4413.61) 7433.89,4480 ; MC1.21@7386.95,4460.55 cw(c7433.89,4413.61) 7433.89,4480 ; MC1.21@7386.95,4499.45 ccw(c7433.89,4546.39) 7433.89,4480 ; MC1.21@7386.95,4499.45 ccw(c7433.89,4546.39) 7433.89,4480 ; MC1.21@7386.95,4499.45 ccw(c7433.89,4546.39) 7433.89,4480 ; 7591.14,4866.14 cw(c7591.14,4822.19) 7625.8,4849.22 ccw(c7591.14,4822.19) 7591.14,4866.14 ; 7591.14,4866.14 ccw(c7591.14,4910.1) 7625.8,4883.06 cw(c7591.14,4910.1) 7591.14,4866.14